# Altium PCB PCB.PcbDoc (part 1 of 2)
Units mil, origin at the board's own origin, x right, y up, seen from the top; angles counter-clockwise.
Board outline 4133.86 x 2519.68 mil, 2 copper layers (Top Layer, Bottom Layer), stack 42.17 mil thick; 80 components, 36 nets, 189 pads, 13 vias.
Unrouted connection lines stored in the file: 60.
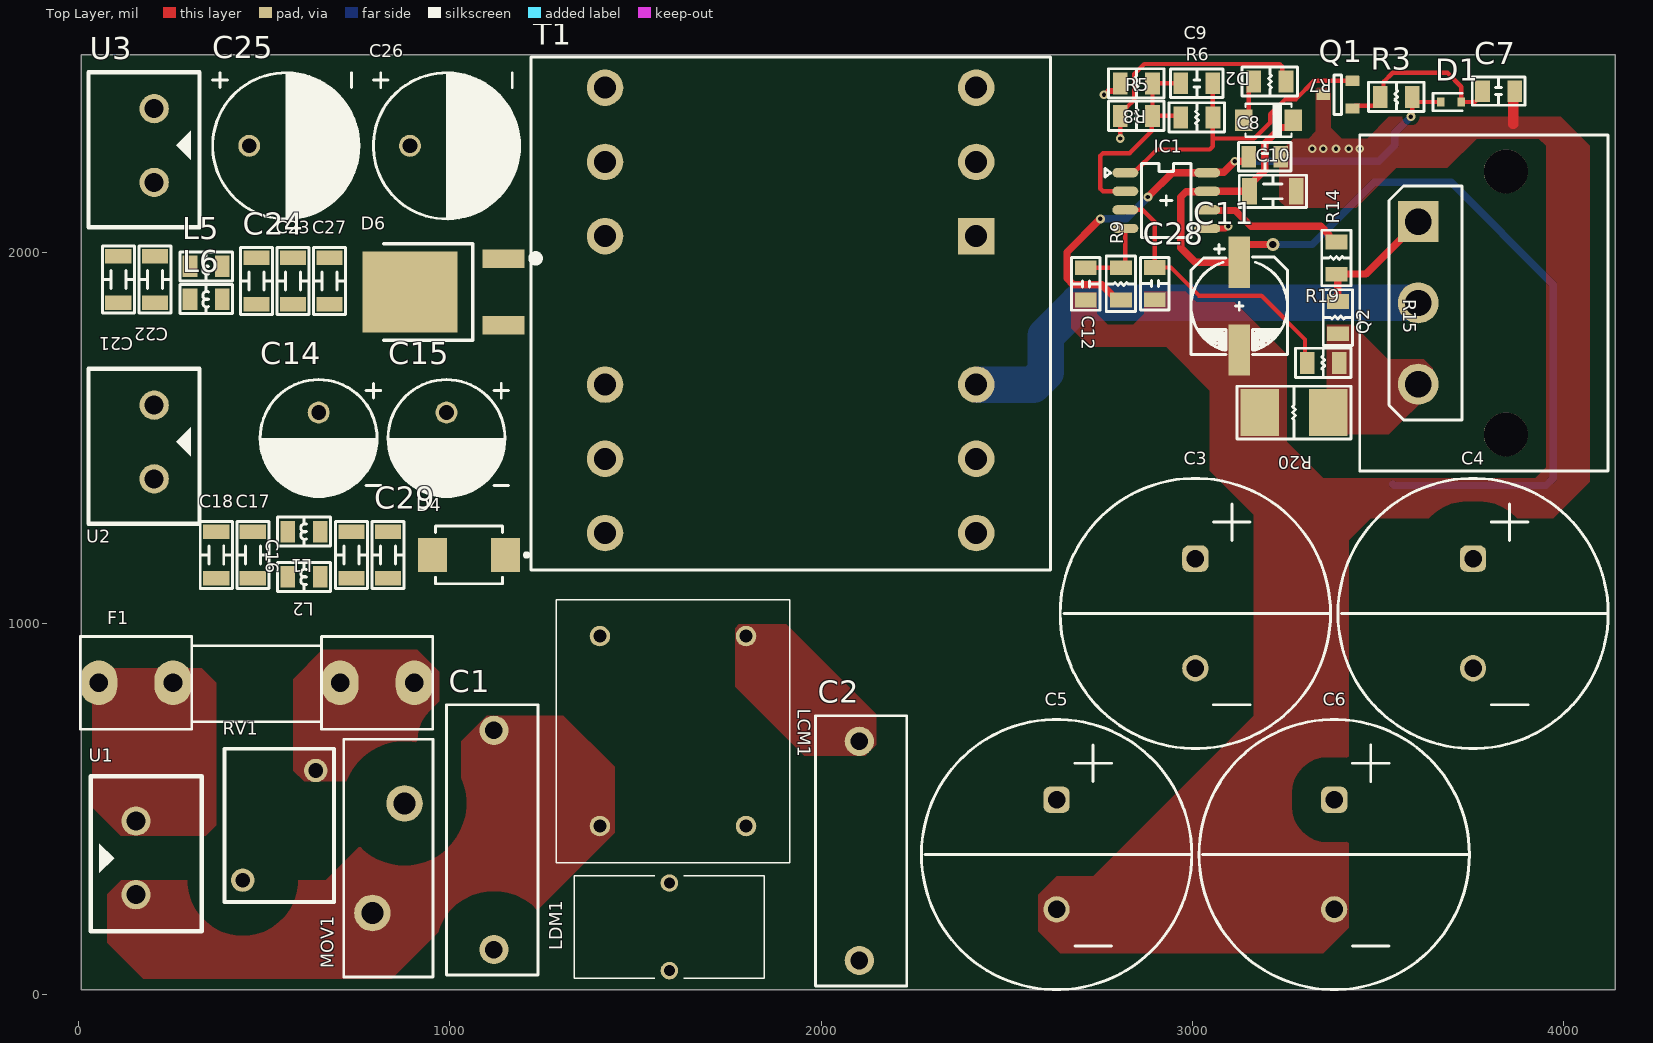
[diagram p0: Top Layer view]
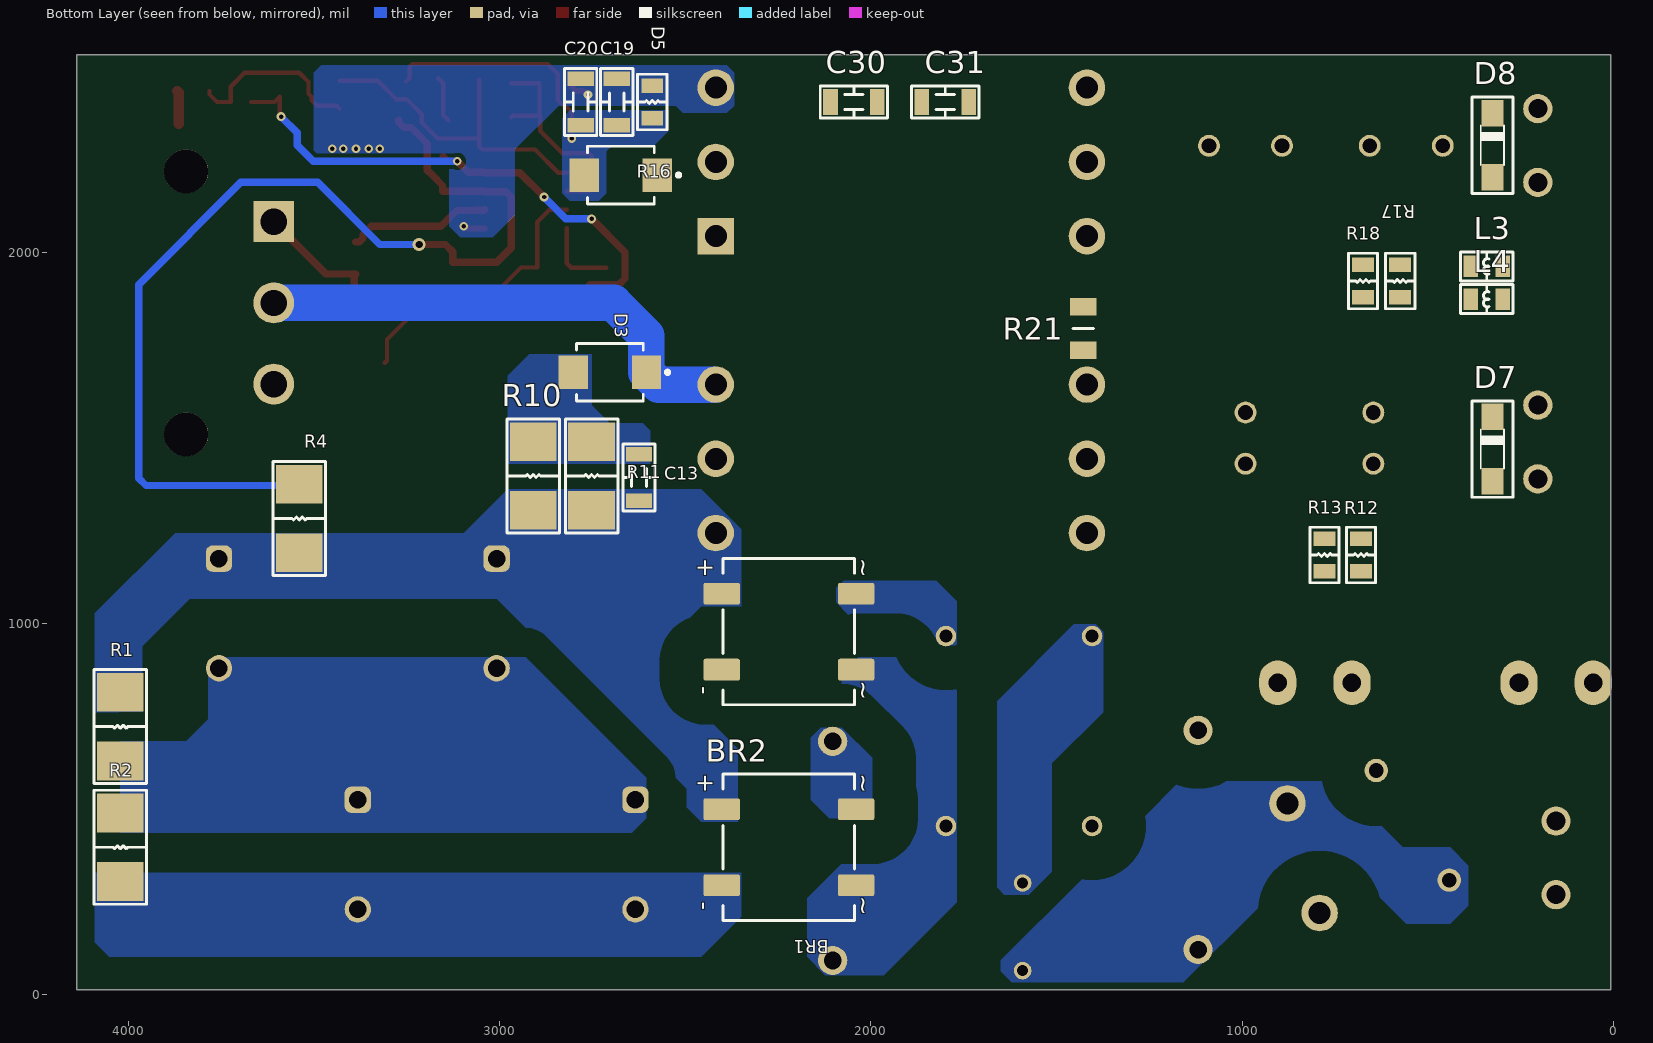
[diagram p1: Bottom Layer view, seen from below]

## Layer stack, top to bottom
Top Solder: solder mask 0.4, Solder Resist, Dk 3.5
Top Layer: signal copper 1.4
Dielectric 1: dielectric 39.3701, FR-4, Dk 4.8
Bottom Layer: signal copper 1.4
Bottom Solder: solder mask 0.4, Solder Resist, Dk 3.5

## Board outline
6.56,13.78 6.56,2533.46 4140.42,2533.46 4140.42,13.78

## Design rules (kind name [scope] priority, off if disabled: settings)
Clearance VOUT_HV_AC [InNetClass('VOUT') vs InNetClass('HV_AC')] p1: gap=157.48 ignorepadtopadclearanceinfootprint=TRUE
Clearance VOUT_HV_DC [InNetClass('HV_DC') vs InNetClass('VOUT')] p2: gap=78.74 ignorepadtopadclearanceinfootprint=TRUE
Clearance HV_AC [InNetClass('HV_AC') vs InNetClass('HV_AC')] p3: gap=118.11 ignorepadtopadclearanceinfootprint=TRUE
Clearance HV_AC_DC [InNetClass('HV_DC') vs InNetClass('HV_AC')] p4: gap=78.74 ignorepadtopadclearanceinfootprint=TRUE
Clearance HV_DC_1 [InNet('VIN') vs InNet('GND')] p5: gap=118.11 ignorepadtopadclearanceinfootprint=TRUE
Clearance HV_DC [InNetClass('HV_DC') vs InNetClass('HV_DC')] p6: gap=78.74 ignorepadtopadclearanceinfootprint=TRUE
Clearance VOUT [InNetClass('VOUT') vs InNetClass('VOUT')] p7: gap=19.68 ignorepadtopadclearanceinfootprint=TRUE
Clearance [All] p8: gap=11.81 ignorepadtopadclearanceinfootprint=TRUE
PlaneConnect [All] p1: planeconnectstyle=Direct reliefexpansion=20 reliefentries=4 reliefconductorwidth=10 reliefairgap=10
PolygonConnect [All] p1: connectstyle=Direct reliefconductorwidth=10 reliefentries=4 polygonreliefangle="90 Angle" airgapwidth=10
RoutingVias [All] p1: holewidth=19.68 width=35.43 viastyle="Through Hole" minholewidth=11.81 minwidth=23.62 maxholewidth=27.56 maxwidth=47.24
SolderMaskExpansion [All] p1: expansion=4 istentingtop=FALSE
Width [All] p1: maxlimit=78.74 minlimit=11.81 preferedwidth=19.68 minimp=50.000000 maximp=50.000000 favimp=50.000000
29 further rules are at their usual default settings.

## Classes and differential pairs
net class HV_DC: GND NetC3_2 VIN
net class HV_AC: AC_L1 AC_L2 AC_L3 AC_N1 AC_N2 NetF1_2

## Components (designator, comment, footprint, x,y, rotation, side; value= is the part's Value field where it differs from the comment)
BR1 "DBLS208GH" "DB SMD" 2221.13,978.35 r90 bottom
BR2 "DBLS208GH" "DB SMD" 2221.13,397.64 r90 bottom
C1 "R474I2470CKA2M" R474I2470CKA2M 1118.76,122.05 r90 top
C2 "R474I2470CKA2M" R474I2470CKA2M 2103.02,683.07 r270 top
C3 "Capcitor" 450BXW68MEFR18X25 3008.53,1175.2 r270 top value="450V 68uF"
C4 "Capcitor" 450BXW68MEFR18X25 3756.56,1175.2 r270 top value="450V 68uF"
C5 "Capcitor" 450BXW68MEFR18X25 2634.51,525.59 r270 top value="450V 68uF"
C6 "Capcitor" 450BXW68MEFR18X25 3382.54,525.59 r270 top value="450V 68uF"
C7 "GRM219R7YA105KA12D" "CAP 0805" 3825.46,2435.04 r0 top value="0805 1uF 35V"
C8 "CL21B104KBCNNNC" "CAP 0805" 3195.54,2257.87 r180 top value="0805 0.1uF 50V"
C9 "GRM2195C1H103JA01D" "CAP 0805" 3012.46,2455.75 r180 top value="0805 10nF"
C10 "C3216X7R1H475M160AC" "Cap 1206" 3217.19,2164.92 r0 top value="1206 4.7uF 50V"
C11 "EEE-FK1H470XL" C-50-47uf_alu 3126.64,1844.49 r0 top value="50V 47uF_6.3pi/smd"
C12 "GCM216R71H102KA37D" "CAP 0805" 2713.25,1915.35 r270 top value="0805 1nF"
C13 "VJ1206A391JXEAT" "Cap 1206" 2624.67,1393.98 r90 bottom value="1206 390pF 500V"
C14 "10ZLH1500MEFC8X20" 10ZLH1500MEFC8X20 646.32,1500 r0 top value="10V 1500uF"
C15 "10ZLH1500MEFC8X20" 10ZLH1500MEFC8X20 990.81,1500 r0 top value="10V 1500uF"
C16 "C3216X7R1H475M160AC" "Cap 1206" 734.91,1185.04 r90 top value="1206 4.7uF 50V"
C17 "C3216X7R1H475M160AC" "CAP 1206" 469.16,1185.04 r270 top value="1206 4.7uF 50V"
C18 "C3216X7R1H475M160AC" "CAP 1206" 370.73,1185.04 r270 top value="1206 4.7uF 50V"
C19 "C3216X7R1H475M160AC" "Cap 1206" 2684.91,2405.51 r90 bottom value="1206 4.7uF 50V"
C20 "C3216X7R1H475M160AC" "Cap 1206" 2782.15,2405.51 r90 bottom value="1206 4.7uF 50V"
C21 "C3216X7R1H475M160AC" "CAP 1206" 106.86,1927.17 r270 top value="1206 4.7uF 50V"
C22 "C3216X7R1H475M160AC" "CAP 1206" 205.29,1927.17 r270 top value="1206 4.7uF 50V"
C23 "C3216X7R1H475M160AC" "Cap 1206" 577.11,1923.23 r270 top value="1206 4.7uF 50V"
C24 "C3216X7R1H475M160AC" "Cap 1206" 478.69,1923.23 r270 top value="1206 4.7uF 50V"
C25 "35ZLJ560M10X20" 35ZLJ560M10X20 557.74,2287.4 r90 top value="35V 560uF"
C26 "35ZLJ560M10X20" 35ZLJ560M10X20 990.81,2287.4 r90 top value="35V 560uF"
C27 "C3216X7R1H475M160AC" "CAP 1206" 675.54,1923.23 r270 top value="1206 4.7uF 50V"
C28 "C0805C101J5RACTU" "CAP 0805" 2898.88,1916.21 r270 top
C29 "C3216X7R1H475M160AC" "Cap 1206" 833.33,1185.04 r270 top value="1206 4.7uF 50V"
C30 "CC1206KKX7RCBB222" "Cap 1206" 2045.95,2405.51 r180 bottom value="1206 2.2nF 1kV"
C31 "CC1206KKX7RCBB222" "Cap 1206" 1799.89,2405.51 r180 bottom value="1206 2.2nF 1kV"
D1 "PMEG3010EB,115" "SOD 523" 3697.5,2405.51 r90 top
D2 "STPST1H100ZFY" SOD-123FL 3205.38,2356.3 r180 top
D3 "S3MB-13-F" "DIODE 1KV 3A" 2703.41,1677.17 r0 bottom value=40pF
D4 "S3MB-13-F" "DIODE 1KV 3A" 1051.26,1185.04 r180 top value=40pF
D5 "S3MB-13-F" "DIODE 1KV 3A" 2673.88,2208.66 r0 bottom value=40pF
D6 "FFSD0665B-F085" "Schottky Diode 650V" 892.39,1893.7 r90 top
D7 "SMAJ5.0A" "SMA (DO-214AC)" 325.46,1470.47 r270 bottom
D8 "SMAJ24CA" "SMA (DO-214AC)" 325.46,2288.98 r270 bottom
F1 "FUSE" FUSE 479,840.55 r0 top
IC1 "UC3843AD8TR" UC3843_SOIC8 2929.79,2139.76 r0 top
L1 "BLM21PG300SN1D" "BEAD 2012" 606.95,1248.03 r180 top value="0805 30R"
L2 "BLM21PG300SN1D" "BEAD 2012" 606.95,1125.98 r180 top value="0805 30R"
L3 "BLM21PG300SN1D" "Bead 2012" 340.93,1962.6 r0 bottom value="0805 30R"
L4 "BLM21PG300SN1D" "Bead 2012" 340.93,1874.02 r0 bottom value="0805 30R"
L5 "BLM21PG300SN1D" "Bead 2012" 343.08,1962.6 r180 top value="0805 30R"
L6 "BLM21PG300SN1D" "Bead 2012" 343.08,1874.02 r180 top value="0805 30R"
LCM1 "SU10VD-10020" SU10VD10020 1404.2,966.54 r270 top
LDM1 "SN5-300" SN5300 1591.2,64.96 r0 top
MOV1 "MOV-14D751K" B72214S2271K101 834.46,368.11 r270 top
Q1 "BJT PNP 40V" "SOT 23 3" 3392.39,2425.2 r90 top
Q2 "SIHG11N80AE-GE3" "N-CH MOSFET 1K2V" 3608.92,1864.17 r270 top
R1 "35221M0JT" "RES 2512" 4022.31,722.44 r90 bottom value="2512 1M"
R2 "35221M0JT" "RES 2512" 4022.31,397.64 r90 bottom value="2512 1M"
R3 "RC0805FR-0733KL" "RES 0805" 3549.87,2415.35 r180 top value="0805 33k"
R4 "35221M0JT" "RES 2512" 3540.02,1283.46 r90 bottom value="2512 1M"
R5 "RC0805FR-0733KL" "RES 0805" 2849.63,2364.17 r180 top value="0805 33k"
R6 "RC0805FR-1310KL" "RES 0805" 3012.62,2368.11 r0 top value="0805 10k"
R7 "RC0805FR-0722RP" "RES 0805" 3209.32,2456.69 r180 top value="0805 22R"
R8 "RC0805FR-1312KL" "RES 0805" 2849.63,2459.68 r0 top value="0805 12k"
R9 "RC0805FR-1312KL" "RES 0805" 2811.68,1915.39 r270 top value="0805 12k"
R10 "CRGP2512F180K" "RES 2512" 2910.1,1397.91 r270 bottom value="2512 180k"
R11 "CRGP2512F180K" "RES 2512" 2752.62,1397.91 r270 bottom value="2512 180k"
R12 "RC0805FR-1310KL" "RES 0805" 675.85,1185.04 r270 bottom value="0805 10k"
R13 "RC0805FR-1310KL" "RES 0805" 774.28,1185.04 r270 bottom value="0805 10k"
R14 "RC0805FR-0722RP" "RES 0805" 3392.39,1985.15 r270 top value="0805 22R"
R15 "RC0805FR-1310KL" "RES 0805" 3388.45,1824.8 r90 top value="0805 10k"
R16 "RC0805FR-1310KL" "RES 0805" 2585.3,2405.51 r270 bottom value="0805 10k"
R17 "RC0805FR-1310KL" "RES 0805" 577.99,1923.23 r90 bottom value="0805 10k"
R18 "RC0805FR-1310KL" "RES 0805" 678.16,1923.23 r90 bottom value="0805 10k"
R19 "RC0805FR-07470RP" "RES 0805" 3353.02,1706.69 r0 top value="0805 470R"
R20 "RES_2512_2.2R" "RES 2512" 3274.28,1568.9 r0 top value="2512 2.2R"
R21 "RES_1206_0R" "RES 1206" 1427.82,1795.28 r270 bottom value="1206 0R"
RV1 "NTC20D-9" NTC20D9 540.21,456.69 r270 top
T1 "PQ 32/20" "Core PQ32/20" 1917.98,1844.09 r90 top
U1 "KF301_2P" KF301_2P 154.2,368.11 r270 top
U2 "KF301_2P" KF301_2P 203.41,1490.16 r90 top
U3 "KF301_2P" KF301_2P 203.41,2288.98 r90 top

## Footprints (in the part's own frame and the unit in brackets; to place one, negate y for a bottom-side part, rotate by r counter-clockwise, add the part's x,y. Pads: shape width x height; smd on the part's side, far side on the other; paste and mask are expansions set on the pad)
10ZLH1500MEFC8X20 [mm]
  round 1.5 hole 1: 1(0,1.75) 2(0,-1.75)
  silkscreen extent -4,-4 4.25,4, body extent -4.25,-4.25 4.25,4.28, height 22.01
35ZLJ560M10X20 [mm]
  round 1.5 hole 1: 1(0,2.5) 2(0,-2.5)
  silkscreen extent -5,-5 5,5, body extent -5.24,-5.25 5.24,5.27, height 22.01
450BXW68MEFR18X25 [mm] "Cap 68uF 450V"
  rrect50% 1.8x1.8 hole 1.2: 1(0,0)
  round 1.8 hole 1.2: 2(7.5,0)
  silkscreen extent -5.5,-9.25 13,9.25, body extent -5.23,-9 12.75,9, height 25
B72214S2271K101 [mm] "430 V 6 kA Varistor 1 Circuit Through Hole Disc 14mm"
  round 2.5 hole 1.5: 1(-3.75,1.1) 2(3.75,-1.1)
  silkscreen extent -8.13,-3.05 8.13,3.05, body extent -7.75,-2.1 7.75,2.1, height 18.5
"BEAD 2012" [mm] "Bead 2012"
  rect 1x1.47 smd: 1(-1.1,0) 2(1.1,0)
  silkscreen extent -1.8,-1 1.8,0.99, body extent -1,-0.69 1,0.76, height 1.28
"Bead 2012" [mm] "Bead 2012"
  rect 1x1.47 smd: 1(-1.1,0) 2(1.1,0)
  silkscreen extent -1.8,-1 1.8,0.99, body extent -1,-0.69 1,0.76, height 1.28
C-50-47uf_alu [mm]
  rect 1.5x3.5 smd: 1(0,3.284) 2(0,-2.716)
  silkscreen extent -3.3,-3.02 3.31,4.48, body extent -3.4,-3.69 3.4,4.26, height 7.7
"CAP 0805" [mm] "0805 (2012)"
  rect 1x1.47 smd: 1(-1.1,0) 2(1.1,0)
  silkscreen extent -1.8,-0.98 1.8,0.98, body extent -1,-0.69 1,0.76, height 1.28
"Cap 1206" [mm]
  rect 1x1.8 smd: 1(-1.6,0) 2(1.6,0)
  silkscreen extent -2.3,-1.1 2.3,1.1, body extent -1.7,-0.85 1.7,0.9, height 1.8
"CAP 1206" [mm]
  rect 1x1.8 smd: 1(-1.6,0) 2(1.6,0)
  silkscreen extent -2.3,-1.1 2.3,1.1, body extent -1.7,-0.85 1.7,0.9, height 1.8
"Core PQ32/20" [mm]
  round 2.5 hole 1.5: 1(15.24,-12.7) 2(10.16,-12.7) 4(-5.08,-12.7) 5(-10.16,-12.7) 6(-15.24,-12.7) 7(15.24,12.7) 8(10.16,12.7) 9(5.08,12.7) 10(-5.08,12.7) 11(-10.16,12.7) 12(-15.24,12.7)
  rect 2.5x2.5 hole 1.5: 3(5.08,-12.7)
  silkscreen extent -17.78,-17.78 17.34,17.78, body extent -16,-17 16,17, height 20
"DB SMD" [mm]
  rrect20% 1.5x2.5 smd: +(2.6,4.6) -(-2.6,4.6) ~1(-2.6,-4.6) ~2(2.6,-4.6)
  silkscreen extent -5,-4.5 5,4.5, body extent -4.16,-5.02 4.16,5.02, height 2.93
"DIODE 1KV 3A" [mm]
  rect 2x2.3 smd paste+0: A(-2.5,0) K(2.5,0)
  silkscreen extent -4.07,-1.97 2.28,1.97, body extent -2.66,-1.81 2.64,1.81, height 2.5
FUSE [mil] "De Fuse"
  oval 100x120 hole 50: 1(-425,0) 1(-225,0) 2(225,0) 2(425,0)
  silkscreen extent -475,-125 475,125, body extent -448,-117 459,127, height 378
KF301_2P [mm] "Header Power 2 pins Type: KF301, 2 pins, 200mil (5.08mm) pitch"
  round 2 hole 1.3 mask+0.1: 1(-2.54,0) 2(2.5,0)
  silkscreen extent -5.6,-3.1 5,4.5, body extent -5.6,-3 5,4.6, height 10
"N-CH MOSFET 1K2V" [mm]
  round 3 hole 3 unplated: 4(-9,6) 4(9,6)
  round 2.8 hole 1.8: D(0,0) S(5.56,0)
  rect 2.8x2.8 hole 1.8: G(-5.56,0)
  silkscreen extent -11.5,-4 11.5,13, body extent -11.5,-4 11.5,13, height 25
NTC20D9 [mm]
  round 1.6 hole 1 paste-2539.97 mask+0.1: 1(-3.75,2.5) 2(3.75,-2.5)
  silkscreen extent -5.25,-3.75 5.25,3.75
R474I2470CKA2M [mm]
  round 2 hole 1.2: 1(0,0) 2(15,0)
  silkscreen extent -1.75,-3 16.75,3.25, body extent -1.65,-3 16.65,3.21, height 17.6
"RES 0805" [mm] "Resistor 2.0 x 1.2 mm (LxW typ)"
  rect 1x1.5 smd: 1(-1.1,-0.1) 2(1.1,-0.1)
  silkscreen extent -1.9,-1.1 1.9,0.9, body extent -1,-0.7 1,0.55, height 0.6
"RES 1206" [mm]
  rect 1.2x1.8 smd: 1(-1.5,0) 2(1.5,0)
  silkscreen extent 0,-0.7 0,0.7, body extent -1.6,-0.8 1.6,0.8, height 0.75
"RES 2512" [mm]
  rect 2.65x3.2 smd: 1(-2.35,0) 2(2.35,0)
  silkscreen extent -3.9,-1.8 3.9,1.8, body extent -3.17,-1.5 3.17,1.5, height 0.8
"Schottky Diode 650V" [mm]
  rect 1.25x2.85 smd: 1(2.28,-6.4) 2(-2.28,-6.4)
  rect 5.55x6.5 smd: 2(0,0)
  silkscreen extent -3.3,-8.84 3.3,1.8, body extent -3.36,-7.39 3.36,3.02, height 2.39
"SMA (DO-214AC)" [mm]
  rect 1.8x1.5 smd: A(2.2,0) K(-2.2,0)
  silkscreen extent -3.3,-1.4 3.3,1.4, body extent -2.6,-1.36 2.6,1.36, height 2.7
SN5300 [mm]
  round 1.2 hole 0.75: 1(0,0) 2(0,6)
  silkscreen extent -6.5,-0.5 6.5,6.5, body extent -6.5,-0.5 6.5,6.5, height 11.5
"SOD 523" [mm]
  rect 0.6x0.5 smd: A(0,-0.7) K(0,0.7)
  silkscreen extent -0.6,-0.75 0.6,1.25, body extent -0.4,-0.8 0.4,0.8, height 0.65
SOD-123FL [mm]
  rect 1.2x1.5 smd: A(1.7,0) K(-1.7,0)
  silkscreen extent -1.57,-1.2 1.57,1.2, body extent -1.96,-1 1.96,1, height 1.1
"SOT 23 3" [mm]
  rrect10% 0.7x0.95 smd: B(-0.95,-1) C(0,1) E(0.95,-1)
  silkscreen extent -1.35,-0.25 1.35,0.25, body extent -1.45,-1.2 1.45,1.2, height 1.11
SU10VD10020 [mm]
  round 1.4 hole 0.9: 1(0,0) 2(13,0) 3(0,10) 4(13,10)
  silkscreen extent -2.5,-3 15.5,13, body extent -2.5,-3 15.5,13, height 19.94
UC3843_SOIC8 [mil] "SOIC8"
  oval 70x25 smd: 1(-109.96,75.16) 2(-109.96,25.16) 3(-109.96,-24.84) 4(-109.96,-74.84) 5(110.51,-74.84) 6(110.51,-24.84) 7(110.51,25.16) 8(110.51,75.16)
  silkscreen extent -165,-100 67,100, body extent -117,-96 119,96, height 69

## Part data
BR1 BR2: library part "BRIDGE RECT 1.2KV 2A", "Bridge Rectifier Single Phase Standard 1.2 kV Surface Mount DBLS", Manufacturer=FairchildSemiconductor, Operating Temperature=-55to150°C, Package=4SDIPSMD, Package Description="4-Pin Surface Mount Device, Body 8.28 x 6.35 mm, Pitch 5.1 mm", Package Reference="SDIP 4L", Peak Average Forward Current=1.5@Ta=40CA, Peak Forward Voltage=1.1@1AV, Peak Reverse Current=5uA, Peak Reverse Repetitive Voltage=1000V, Supplier Part Number 1=1801-DBLS158GCT-ND, Bridge Type=SinglePhase, Category=BridgeRectifier, Configuration=Single, Datasheet URL=http://www.farnell.com/datasheets/1941063.pdf, Datasheet Version="Rev. 1.5, 05/2015", Manufacturer URL=https://www.fairchildsemi.com/, Mounting=SurfaceMount, Mounting Technology=SurfaceMount, Packaging=Tape&Reel, Supplier 1=Digikey
C1 C2: "0.047 µF Film Capacitor 440V 1000V (1kV) Polypropylene (PP), Metallized Radial", Capacitance=47nF, Case/Package=Radial, Dielectric Material=PP, Manufacturer 1=KEMET, Max Operating Temperature=110°C, Min Operating Temperature=-40°C, Ratings=AEC-Q200,X1, Supplier Part Number 1=399-17231-1-ND, Tolerance=20%, Voltage Rating (AC)=440V, Voltage Rating (DC)=1kV, Category 1="Film Capacitors", ComponentLink1Description=https://datasheet.ciiva.com/46436/1848873-46436253.pdf?src-supplier=Element14, ComponentLink1URL=https://datasheet.ciiva.com/46436/1848873-46436253.pdf?src-supplier=Element14, Description 1="Cap Film 0.047UF 20% 1KVDC Rad", Manufacturer Part Number 1=R474I2470CKA2M, Mount="Through Hole", Packaging="Cut Tape", Parameter 1="0.047uF 440Vac", Pricing 1="1=0,69, 10=0,482, 50=0,4056, 100=0,3302, 500=0,27518 (USD)", RoHS 1=Yes, RoHS Compliant=Yes, Series=R47, Stock 1=4929, Supplier 1=Digikey, Termination="PC Pins"
C3 C4 C5 C6: library part 450BXW68MEFR18X25, "Capcitor-ALU-450V 68uF"
C7: library part "Cap 0805 1uF", "1 µF ±10% 35V Ceramic Capacitor X7R 0805 (2012 Metric)", Supplier Part Number 1=490-10494-1-ND, Supplier 1=Digi-Key
C8: library part "Cap 0805 0.1uF", "0.1 µF ±10% 50V Ceramic Capacitor X7R 0805 (2012 Metric)", Manufacturer 1=Samsung, Supplier Part Number 1=1276-1003-1-ND, Category 1="Ceramic Capacitors", ComponentLink1Description=https://datasheet.ciiva.com/25710/cl21b104kbcnnnc-25710182.pdf?src-supplier=Digi-Key, ComponentLink1URL=https://datasheet.ciiva.com/25710/cl21b104kbcnnnc-25710182.pdf?src-supplier=Digi-Key, ComponentLink2Description=https://datasheet.ciiva.com/29199/454152-da-01-en-vs-kondensator-0805-29199814.pdf?src-supplier=Conrad, ComponentLink2URL=https://datasheet.ciiva.com/29199/454152-da-01-en-vs-kondensator-0805-29199814.pdf?src-supplier=Conrad, Description 1="Multilayer Ceramic Capacitor, 0.1 uF, 50 V, ± 10%, X7R, 0805 [2012 Metric]", Manufacturer Part Number 1=CL21B104KBCNNNC, Pricing 1="1=0,1, 10=0,044, 50=0,024, 100=0,0196, 500=0,01404, 1000=0,01103 (USD)", RoHS 1=Yes, Stock 1=559254, Supplier 1=Digi-Key
C9: library part "Cap 0805 10nF", "10000 pF ±5% 50V Ceramic Capacitor C0G, NP0 0805 (2012 Metric)", Manufacturer 1=Murata, Manufacturer Part Number 1=GRM21BR61H106KE43L, Supplier Part Number 1=490-1642-1-ND, Category 1="Ceramic Capacitors", ComponentLink1Description=https://datasheet.octopart.com/GRM21BR61H106KE43L-Murata-datasheet-155345082.pdf?src-supplier=Element14, ComponentLink1URL=https://datasheet.octopart.com/GRM21BR61H106KE43L-Murata-datasheet-155345082.pdf?src-supplier=Element14, ComponentLink2Description=https://search.murata.co.jp/Ceramy/image/img/A01X/G101/ENG/GRM21BR61H106KE43-01A.pdf?src-supplier=Digi-Key, ComponentLink2URL=https://search.murata.co.jp/Ceramy/image/img/A01X/G101/ENG/GRM21BR61H106KE43-01A.pdf?src-supplier=Digi-Key, ComponentLink3Description=https://datasheet.octopart.com/GRM21BR61H106KE43L-Murata-datasheet-165579666.pdf?src-supplier=TME, ComponentLink3URL=https://datasheet.octopart.com/GRM21BR61H106KE43L-Murata-datasheet-165579666.pdf?src-supplier=TME, Description 1="Capacitor Ceramic Multilayer", Pricing 1="1=0,3, 10=0,209, 50=0,139, 100=0,1182, 500=0,08342, 1000=0,073 (USD)", RoHS 1=Yes, Stock 1=19692, Supplier 1=Digikey
C10 C16 C17 C18 C19 C20 C21 C22 C23 C24 C27 C29: library part "Cap 1206 4.7uF", "4.7 µF ±20% 50V Ceramic Capacitor X7R 1206 (3216 Metric)", Capacitance=10uF, Case Code (Imperial)=1206, Case Code (Metric)=3216, Dielectric=X7R, Manufacturer 1=TDK, Manufacturer Part Number 1=CGA5L1X7R1V106M160AC, Max Operating Temperature=125°C, Min Operating Temperature=-55°C, Package Quantity=2000, Ratings=AEC-Q200, Supplier Part Number 1=445-8033-1-ND, Tolerance=20%, Voltage Rating=35V, Case/Package=1206, Category 1="Ceramic Capacitors", ComponentLink1Description=https://product.tdk.com/info/en/catalog/datasheets/mlcc_automotive_general_en.pdf?src-supplier=Digi-Key, ComponentLink1URL=https://product.tdk.com/info/en/catalog/datasheets/mlcc_automotive_general_en.pdf?src-supplier=Digi-Key, ComponentLink2Description=http://product.tdk.com/capacitor/mlcc/detailed_information.php?lang=en&ref=jp&part_no=CGA5L1X7R1V106M160AC&src-supplier=Mouser, ComponentLink2URL=http://product.tdk.com/capacitor/mlcc/detailed_information.php?lang=en&ref=jp&part_no=CGA5L1X7R1V106M160AC&src-supplier=Mouser, ComponentLink3Description=http://product.tdk.com/capacitor/mlcc/class/print_detail_pdf.php?lang=en&part_no=CGA5L1X7R1V106M160AC&src-supplier=Avnet, ComponentLink3URL=http://product.tdk.com/capacitor/mlcc/class/print_detail_pdf.php?lang=en&part_no=CGA5L1X7R1V106M160AC&src-supplier=Avnet, ComponentLink4Description=https://product.tdk.com/info/en/catalog/spec/mlccspec_automotive_general_midvoltage_en.pdf?src-supplier=Digi-Key, ComponentLink4URL=https://product.tdk.com/info/en/catalog/spec/mlccspec_automotive_general_midvoltage_en.pdf?src-supplier=Digi-Key, Description 1="Cap Ceramic 10uF 35V X7R 20% SMD 1206 125°C Blister Plastic T/R", Height=1.6mm, Length=0.126inch, Mount="Surface Mount", Packaging="Tape and Reel", Pricing 1="1=0,72, 10=0,53, 50=0,4242, 100=0,3636, 500=0,28784, 1000=0,2424 (USD)", RoHS 1=Yes, RoHS Compliant=Yes, Series=CGA, Stock 1=4126, Supplier 1=Digikey, Termination=SMD/SMT, Thickness=0.071inch, Voltage Rating (DC)=35V, Weight=0.000571oz, Width=1.6mm
C11: library part "Capacitor-50V 47u_6.3pi", "CAP ALUM 47UF 20% 50V SMD", Manufacturer=Panasonic, Package/Case="6.3mm (dia)", Supplier Part Number=10-EEE-FK1H470XLCTND, Supplier Part Number 1=10-EEE-FK1H470XLCT-ND, Supplier 1=Digi-Key
C12: library part "Cap 0805 1nF", "1000 pF 50 VDC 10% 0805 X7R", Manufacturer 1=Murata, Manufacturer Part Number 1=GRM21BR61H106KE43L, Supplier Part Number 1=490-6057-1-ND, Category 1="Ceramic Capacitors", ComponentLink1Description=https://datasheet.octopart.com/GRM21BR61H106KE43L-Murata-datasheet-155345082.pdf?src-supplier=Element14, ComponentLink1URL=https://datasheet.octopart.com/GRM21BR61H106KE43L-Murata-datasheet-155345082.pdf?src-supplier=Element14, ComponentLink2Description=https://search.murata.co.jp/Ceramy/image/img/A01X/G101/ENG/GRM21BR61H106KE43-01A.pdf?src-supplier=Digi-Key, ComponentLink2URL=https://search.murata.co.jp/Ceramy/image/img/A01X/G101/ENG/GRM21BR61H106KE43-01A.pdf?src-supplier=Digi-Key, ComponentLink3Description=https://datasheet.octopart.com/GRM21BR61H106KE43L-Murata-datasheet-165579666.pdf?src-supplier=TME, ComponentLink3URL=https://datasheet.octopart.com/GRM21BR61H106KE43L-Murata-datasheet-165579666.pdf?src-supplier=TME, Description 1="Capacitor Ceramic Multilayer", Pricing 1="1=0,3, 10=0,209, 50=0,139, 100=0,1182, 500=0,08342, 1000=0,073 (USD)", RoHS 1=Yes, Stock 1=19692, Supplier 1=Digikey
C13: library part "Cap 1206 390pF", "CAP CER 390PF 500V C0G/NP0 1206", Capacitance=390pF, Case Code (Imperial)=1206, Case Code (Metric)=3216, Dielectric=X7R, Manufacturer 1=TDK, Manufacturer Part Number 1=CGA5L1X7R1V106M160AC, Max Operating Temperature=125°C, Min Operating Temperature=-55°C, Package Quantity=2000, Ratings=AEC-Q200, Supplier Part Number 1=720-VJ1206A391JXEATCT-ND, Tolerance=20%, Voltage Rating=35V, Case/Package=1206, Category 1="Ceramic Capacitors", ComponentLink1Description=https://product.tdk.com/info/en/catalog/datasheets/mlcc_automotive_general_en.pdf?src-supplier=Digi-Key, ComponentLink1URL=https://product.tdk.com/info/en/catalog/datasheets/mlcc_automotive_general_en.pdf?src-supplier=Digi-Key, ComponentLink2Description=http://product.tdk.com/capacitor/mlcc/detailed_information.php?lang=en&ref=jp&part_no=CGA5L1X7R1V106M160AC&src-supplier=Mouser, ComponentLink2URL=http://product.tdk.com/capacitor/mlcc/detailed_information.php?lang=en&ref=jp&part_no=CGA5L1X7R1V106M160AC&src-supplier=Mouser, ComponentLink3Description=http://product.tdk.com/capacitor/mlcc/class/print_detail_pdf.php?lang=en&part_no=CGA5L1X7R1V106M160AC&src-supplier=Avnet, ComponentLink3URL=http://product.tdk.com/capacitor/mlcc/class/print_detail_pdf.php?lang=en&part_no=CGA5L1X7R1V106M160AC&src-supplier=Avnet, ComponentLink4Description=https://product.tdk.com/info/en/catalog/spec/mlccspec_automotive_general_midvoltage_en.pdf?src-supplier=Digi-Key, ComponentLink4URL=https://product.tdk.com/info/en/catalog/spec/mlccspec_automotive_general_midvoltage_en.pdf?src-supplier=Digi-Key, Description 1="Cap Ceramic 10uF 35V X7R 20% SMD 1206 125°C Blister Plastic T/R", Height=1.6mm, Length=0.126inch, Mount="Surface Mount", Packaging="Tape and Reel", Pricing 1="1=0,72, 10=0,53, 50=0,4242, 100=0,3636, 500=0,28784, 1000=0,2424 (USD)", RoHS 1=Yes, RoHS Compliant=Yes, Series=CGA, Stock 1=4126, Supplier 1=Digikey, Termination=SMD/SMT, Thickness=0.071inch, Voltage Rating (DC)=35V, Weight=0.000571oz, Width=1.6mm
C14 C15: "1500 µF 10 V Aluminum Electrolytic Capacitors Radial, Can 8000 Hrs @ 105°C", Manufacturer 1=Rubycon, Supplier Part Number 1=1189-1717-ND, Voltage Rating (DC)=10V, Category 1="Aluminum Electrolytic Capacitors", ComponentLink1Description=https://datasheet.ciiva.com/6311/e-zlh-6311629.pdf?src-supplier=Digikey, ComponentLink1URL=https://datasheet.ciiva.com/6311/e-zlh-6311629.pdf?src-supplier=Digikey, ComponentLink2Description=https://datasheet.ciiva.com/22732/1910927-22732380.pdf?src-supplier=Element14, ComponentLink2URL=https://datasheet.ciiva.com/22732/1910927-22732380.pdf?src-supplier=Element14, Description 1="Radial Can ALUMINUM ELECTROLYTIC CAPACITOR ZLH 10V 1500muF ±20% 0.315Dia 8.00mm", Manufacturer Part Number 1=10ZLH1500MEFC8X20, Pricing 1="1=0,6, 10=0,372, 50=0,277, 100=0,2469, 500=0,19462, 1000=0,17808, 2500=0,16039, 5000=0,14959 (USD)", RoHS 1=Yes, Stock 1=6103, Supplier 1=Digikey
C25 C26: "560 µF 35 V Aluminum Electrolytic Capacitors Radial, Can 10000 Hrs @ 105°C"
C28: library part "CAP 0805 100pF", "CAP, CERM, 100 pF, 50 V, +/- 5%, X7R, 0805", Manufacturer 1=KEMET, Supplier Part Number 1=80-C0805C101J5R, Category 1="Ceramic Capacitors", ComponentLink1Description=http://components.arrow.com/part/dataview/42933017S9108484N7429?src-supplier=Arrow+Electronics, ComponentLink1URL=http://components.arrow.com/part/dataview/42933017S9108484N7429?src-supplier=Arrow+Electronics, ComponentLink2Description=https://datasheet.octopart.com/C0805C101J5RACTU-KEMET-datasheet-157246124.pdf?src-supplier=TME, ComponentLink2URL=https://datasheet.octopart.com/C0805C101J5RACTU-KEMET-datasheet-157246124.pdf?src-supplier=TME, Description 1="Cap Ceramic 100pF 50V X7R 5% SMD 0805 125C Paper T/R", Manufacturer Part Number 1=C0805C101J5RACTU, Parameter 1="0805 100pF 50V", Pricing 1="1=0,14, 10=0,059, 50=0,059, 100=0,034, 1000=0,027, 10000=0,022 (USD)", RoHS 1=Yes, Stock 1=27580, Supplier 1=Mouser
C30 C31: library part "Cap 1206 2.2nF", "2200 pF ±10% 1000V (1kV) Ceramic Capacitor X7R 1206 (3216 Metric)", Manufacturer 1=Yageo, Supplier Part Number 1=311-1511-1-ND, Voltage Rating (AC)=1kV, Category 1="Ceramic Capacitors", ComponentLink1Description=https://datasheet.ciiva.com/11787/0900766b80d8503a-11787843.pdf?src-supplier=Rs, ComponentLink1URL=https://datasheet.ciiva.com/11787/0900766b80d8503a-11787843.pdf?src-supplier=Rs, ComponentLink2Description=https://datasheet.ciiva.com/13264/upy-gp-np0-16v-to-50v-8-3714-13264204.pdf?src-supplier=Mouser, ComponentLink2URL=https://datasheet.ciiva.com/13264/upy-gp-np0-16v-to-50v-8-3714-13264204.pdf?src-supplier=Mouser, ComponentLink3Description=https://datasheet.ciiva.com/190/mlccorderingcode-190678.pdf?src-supplier=Digikey, ComponentLink3URL=https://datasheet.ciiva.com/190/mlccorderingcode-190678.pdf?src-supplier=Digikey, ComponentLink4Description=https://datasheet.ciiva.com/190/mlccorderingcode-190679.pdf?src-supplier=Digikey, ComponentLink4URL=https://datasheet.ciiva.com/190/mlccorderingcode-190679.pdf?src-supplier=Digikey, ComponentLink5Description=https://datasheet.ciiva.com/190/mlccorderingcode-190680.pdf?src-supplier=Digikey, ComponentLink5URL=https://datasheet.ciiva.com/190/mlccorderingcode-190680.pdf?src-supplier=Digikey, Description 1="Multilayer Ceramic Capacitor, 2200 pF, 1000 V, ± 10%, X7R, 1206 [3216 Metric]", Manufacturer Part Number 1=CC1206KKX7RCBB222, Material=4241ConductorMaterial, Pricing 1="1=0,18, 10=0,119, 50=0,0754, 100=0,0603, 500=0,04358, 1000=0,03856 (USD)", RoHS 1=Yes, Stock 1=424375, Supplier 1=Digikey
D1: library part "Diode 30V 1A", "Diode 30 V 1A Surface Mount SOD-523", Average Rectified Current=1A, Forward Voltage=680mV, Manufacturer 1=Nexperia, Max Forward Surge Current (Ifsm)=5A, Max Operating Temperature=150°C, Max Repetitive Reverse Voltage (Vrrm)=30V, Max Reverse Current=500uA, Max Surge Current=3A, Min Operating Temperature=-65°C, Supplier Part Number 1=1727-5834-1-ND, Category 1="Rectifier Diodes", ComponentLink1Description=https://datasheet.octopart.com/BZX585-C9V1%2C135-Nexperia-datasheet-81456219.pdf?src-supplier=Future+Electronics, ComponentLink1URL=https://datasheet.octopart.com/BZX585-C9V1%2C135-Nexperia-datasheet-81456219.pdf?src-supplier=Future+Electronics, ComponentLink2Description=https://assets.nexperia.com/documents/packing/SOD523_115.pdf?src-supplier=Digikey, ComponentLink2URL=https://assets.nexperia.com/documents/packing/SOD523_115.pdf?src-supplier=Digikey, ComponentLink3Description=https://datasheet.octopart.com/PMEG3010EB%2C115-Nexperia-datasheet-12552804.pdf?src-supplier=Farnell, ComponentLink3URL=https://datasheet.octopart.com/PMEG3010EB%2C115-Nexperia-datasheet-12552804.pdf?src-supplier=Farnell, Description 1="Rectifier Diode, Schottky, 1 Phase, 1 Element, 1A, Silicon", Element Configuration=5460ElementConfiguration, Forward Current=1A, Lead Free=5697LeadFree, Manufacturer Part Number 1=PMEG3010EB,115, Max Reverse Leakage Current=500uA, Max Reverse Voltage (DC)=30V, Mount=8Mount, Number of Pins=2NUMBER, Peak Non-Repetitive Surge Current=5A, Pricing 1="1=0,46, 10=0,326, 100=0,1644, 500=0,14572, 1000=0,11341, 3000=0,1015, 6000=0,09923, 9000=0,08789, 30000=0,08676, 75000=0,07371 (USD)", Radiation Hardening=5898YesNo, Reach SVHC Compliant=4186SVHC, RoHS 1=Yes, RoHS Compliant=Yes, Stock 1=7761, Supplier 1=Digikey
D2: "Diode 100 V 1A Surface Mount SOD-123F", Manufacturer 1=STMicroelectronics, Supplier Part Number 1=497-STPST1H100ZFYCT-ND, Category 1=Uncategorized, ComponentLink1Description=https://datasheet.ciiva.com/6574/littelfuse-tvs-diode-smf-datasheet-pdf-6574037.pdf?src-supplier=Digi-Key, ComponentLink1URL=https://datasheet.ciiva.com/6574/littelfuse-tvs-diode-smf-datasheet-pdf-6574037.pdf?src-supplier=Digi-Key, Description 1="Automotive 100 V, 1 A Power Scho", Manufacturer Part Number 1=STPST1H100ZFY, Pricing 1="1=0,36, 10=0,276, 100=0,1655, 500=0,15326, 1000=0,10422 (USD)", RoHS 1=No, Stock 1=4053, Supplier 1=Digikey
D3 D4 D5: library part "DIODE 1000V 3A", "DIODE GEN PURP 1KV 3A SMB", Capacitance=40pF, Forward Current=3A, Manufacturer="Diodes Inc.", Max Junction Temp=+150°C, Max Repetitive Reverse Voltage=1000V, Max Surge Forward Current=100A, Package=SMB, Peak Reverse Current=10uA, Supplier Part Number 1=S3MB-FDICT-ND, Temperature="-65°C to +150°C", Temperature Range Low=-65°C, Automotive=No, Category=Diode, ComponentLink2Description=Datasheet, ComponentLink2URL=https://www.diodes.com/assets/Datasheets/ds16005.pdf, Device Class L1="Discrete Semiconductors", Device Class L2=Diodes, Device Class L3="Rectifier Diodes", Digikey Description="DIODE GEN PURP 1KV 3A SMB", Footprint Url=https://www.diodes.com/assets/Package-Files/SMB.pdf, Height=2.5mm, Lead Free=Yes, Manufacturer Part Number=S3MB-13-F, Mouser Description="Rectifiers 1000V 3A", Octopart=https://octopart.com/s3mb-13-f-diodes+inc.-333387, Reverse Voltage=1000V, RoHS=TRUE, Standoff Height=0.05mm, Supplier 1=Digikey, Temperature Range High=+150°C
D6: library part "Schotty Diode 650V 6A", "Schottky Diodes & Rectifiers 650V 6A SIC SBD", Arrow Part Number=FFSD08120A, Manufacturer_Name=onsemi, Mouser Part Number=863-FFSD08120A, Supplier Part Number 1=5556-FFSD0665B-F085CT-ND, Arrow Price/Stock=https://www.arrow.com/en/products/ffsd08120a/on-semiconductor, Datasheet Link=http://www.onsemi.com/pub/Collateral/FFSD08120A-D.PDF, Manufacturer_Part_Number=FFSD08120A, Mouser Price/Stock=https://www.mouser.co.uk/ProductDetail/onsemi/FFSD08120A?qs=f9yNj16SXrKqhVkeFnS%2F%252BA%3D%3D, Supplier 1=Digikey
D7: "9.2V Clamp 43.5A Ipp Tvs Diode Surface Mount DO-214AC (SMA)", Breakdown Voltage=6.4V, Case/Package=DO-214AC, Clamping Voltage=9.2V, Leakage Current=800uA, Manufacturer 1=Littelfuse, Max Breakdown Voltage=7V, Max Operating Temperature=150°C, Max Power Dissipation=3.3W, Max Surge Current=43.5A, Min Operating Temperature=-65°C, Operating Supply Voltage=5V, Package Quantity=5000, Peak Pulse Power=400W, Power Line Protection=No, Supplier Part Number 1=SMAJ5.0ALFCT-ND, Test Current=10mA, Category 1="TVS Diodes", Clamping Voltage-Max=9.2V, ComponentLink1Description=https://datasheet.ciiva.com/25624/0900766b810f4edb-25624839.pdf?src-supplier=Rs, ComponentLink1URL=https://datasheet.ciiva.com/25624/0900766b810f4edb-25624839.pdf?src-supplier=Rs, ComponentLink2Description=https://datasheet.ciiva.com/8062/littelfuse-tvs-diode-smaj-8062271.pdf?src-supplier=Element14, ComponentLink2URL=https://datasheet.ciiva.com/8062/littelfuse-tvs-diode-smaj-8062271.pdf?src-supplier=Element14, ComponentLink3Description=https://datasheet.ciiva.com/28473/607617-28473433.pdf?src-supplier=Element14, ComponentLink3URL=https://datasheet.ciiva.com/28473/607617-28473433.pdf?src-supplier=Element14, ComponentLink4Description=https://datasheet.ciiva.com/4507/littelfuse-tvs-diode-smaj-23503-4507964.pdf?src-supplier=Mouser, ComponentLink4URL=https://datasheet.ciiva.com/4507/littelfuse-tvs-diode-smaj-23503-4507964.pdf?src-supplier=Mouser, ComponentLink5Description=https://datasheet.ciiva.com/16380/littelfuse-tvs-diode-smaj-16380982.pdf?src-supplier=Future+Electronics, ComponentLink5URL=https://datasheet.ciiva.com/16380/littelfuse-tvs-diode-smaj-16380982.pdf?src-supplier=Future+Electronics, Description 1="SMAJ Series 9.2 V 400 W Surface Mount Uni-Directional TVS Diode - DO-214AC", Diode Type=ZENER, Direction=Unidirectional, Height=2.087mm, Length=4.5mm, Manufacturer Part Number 1=SMAJ5.0A, Max Reverse Leakage Current=800uA, Min Breakdown Voltage=6.4V, Mount="Surface Mount", Number of Channels=1, Number of Elements=1, Number of Pins=2, Number of Unidirectional Channels=1, Packaging="Tape and Reel", Peak Pulse Current=43.5A, Polarity=Unidirectional, Power Dissipation=400W, Pricing 1="1=0,39, 10=0,277, 100=0,1399, 500=0,124, 1000=0,09649, 2000=0,08636, 5000=0,08443, 10000=0,07478, 25000=0,07382, 50000=0,06272, 125000=0,06031 (USD)", Reach SVHC Compliant=No, Reverse Breakdown Voltage=6.4V, Reverse Standoff Voltage=5V, RoHS 1=Yes, RoHS Compliant=Yes, Series=SMAJ, Stock 1=104022, Supplier 1=Digikey, Termination=SMD/SMT, Width=2.79mm
D8: "38.9V Clamp 10.3A Ipp Tvs Diode Surface Mount DO-214AC (SMA)", Case/Package=DO-214AC, Clamping Voltage=38.9V, Leakage Current=1uA, Manufacturer 1=Littelfuse, Max Breakdown Voltage=29.5V, Max Operating Temperature=150°C, Max Power Dissipation=3.3W, Min Breakdown Voltage=26.7V, Min Operating Temperature=-65°C, Peak Pulse Current=10.3A, Peak Pulse Power=400W, Power Line Protection=No, Reverse Standoff Voltage=24V, Supplier Part Number 1=SMAJ24CALFCT-ND, Test Current=1mA, Category 1="TVS Diodes", Clamping Voltage-Max=38.9V, ComponentLink1Description=https://datasheet.ciiva.com/28473/607617-28473406.pdf?src-supplier=Element14, ComponentLink1URL=https://datasheet.ciiva.com/28473/607617-28473406.pdf?src-supplier=Element14, ComponentLink2Description=https://datasheet.ciiva.com/331/littelfuse-tvs-diode-smaj-datasheet-pdf-331049.pdf?src-supplier=Digikey, ComponentLink2URL=https://datasheet.ciiva.com/331/littelfuse-tvs-diode-smaj-datasheet-pdf-331049.pdf?src-supplier=Digikey, ComponentLink3Description=https://datasheet.ciiva.com/331/littelfuse-tvs-diode-smaj-datasheet-pdf-331050.pdf?src-supplier=Digikey, ComponentLink3URL=https://datasheet.ciiva.com/331/littelfuse-tvs-diode-smaj-datasheet-pdf-331050.pdf?src-supplier=Digikey, ComponentLink4Description=https://datasheet.ciiva.com/331/littelfuse-tvs-diode-smaj-datasheet-pdf-331048.pdf?src-supplier=Digikey, ComponentLink4URL=https://datasheet.ciiva.com/331/littelfuse-tvs-diode-smaj-datasheet-pdf-331048.pdf?src-supplier=Digikey, Description 1="SMAJ Series 38.9 V 0.4 kW Surface Mount Bi-Directional TVS Diode - DO-214AC", Diode Type=ZENER, Direction=Bidirectional, Height=2.29mm, Lead Free="Lead Free", Length=5.28mm, Manufacturer Part Number 1=SMAJ24CA, Max Reverse Leakage Current=1uA, Mount="Surface Mount", Number of Bidirectional Channels=1, Number of Elements=1, Number of Pins=2, Packaging="Tape and Reel", Polarity=Bidirectional, Power Dissipation=400W, Pricing 1="1=0,4, 10=0,287, 100=0,1449, 500=0,12844, 1000=0,09996, 2000=0,08947 (USD)", Reach SVHC Compliant=No, Reverse Breakdown Voltage=26.7V, Reverse Voltage=24V, RoHS 1=Yes, RoHS Compliant=Yes, Series=SMAJ, Stock 1=100645, Supplier 1=Digikey, Voltage Rating (DC)=24V, Width=2.79mm
F1: "2 A 250 V AC 125 V DC Fuse Board Mount (Cartridge Style)", Manufacturer=Littelfuse, Manufacturer Part Number=0505025.MXP, Category=Fuses, ComponentLink1Description=https://datasheet.ciiva.com/26890/getdatasheetpartid-706019-26890404.pdf?src-supplier=Verical, ComponentLink1URL=https://datasheet.ciiva.com/26890/getdatasheetpartid-706019-26890404.pdf?src-supplier=Verical, ComponentLink2Description=https://datasheet.ciiva.com/29618/littelfuse-fuse-505-datasheet-pdf-29618152.pdf?src-supplier=Digi-Key, ComponentLink2URL=https://datasheet.ciiva.com/29618/littelfuse-fuse-505-datasheet-pdf-29618152.pdf?src-supplier=Digi-Key, ComponentLink3Description=https://datasheet.ciiva.com/300/littelfuse-fuse-505-300507.pdf?src-supplier=Digi-Key, ComponentLink3URL=https://datasheet.ciiva.com/300/littelfuse-fuse-505-300507.pdf?src-supplier=Digi-Key, ComponentLink4Description=https://datasheet.ciiva.com/7314/697468-7314411.pdf?src-supplier=Newark, ComponentLink4URL=https://datasheet.ciiva.com/7314/697468-7314411.pdf?src-supplier=Newark, Pricing 1="1=5.43, 5=5.244, 10=5.057, 50=3.9336, 100=3.278, 250=3.18436, 500=2.71606, 1000=2.57558 (USD)", RoHS=Yes, Stock 1=3122
IC1: "UC3843 Switching IC 8.4V 500kHz", Supplier Part Number 1=296-27152-1-ND, Supplier 1=Digikey
L1 L2 L3 L4 L5 L6: library part "Bead 0805", "30 Ohms @ 100 MHz 1 Power Line Ferrite Bead 0805 (2012 Metric) 4A 14mOhm", Supplier 1="Arrow Electronics", Supplier Part Number 1=BLM21PG300SN1D
LCM1: "Common Mode Chokes / Filters 250V 0.02mH 1A DCR=0.12Ohms", Manufacturer 1=KEMET, Manufacturer Part Number 1=SCF25XV-350-2R4A003JV, Supplier Part Number 1=399-SCF25XV-350-2R4A003JV-ND, ComponentLink1Description="Datasheet URL", ComponentLink1URL=https://www.mouser.com/ds/2/599/6123-X240-240787.pdf, Description 1="Common Mode Choke, 220Uh, 35A, Radial; Dc Current Rating: 35A; Product Range: scf Series; Inductance: 220Μh", Pricing 1="1=11,56, 10=10,238, 35=9,908, 70=9,57786, 105=9,24752, 245=8,78518 (USD)", RoHS 1=No, Stock 1=63, Supplier 1=Digi-Key
LDM1: "Filters 25uH 2A DCR=42mOhms", Supplier Part Number 1=399-20548-ND, ComponentLink1Description=https://www.allegromicro.com/~/media/Files/Datasheets/ACS72981-Datasheet.ashx?src-supplier=Digi-Key, ComponentLink1URL=https://www.allegromicro.com/~/media/Files/Datasheets/ACS72981-Datasheet.ashx?src-supplier=Digi-Key, Supplier 1=Digikey
MOV1: "750 V 4.5 kA Varistor 1 Circuit Through Hole Disc 14mm", Capacitance=270pF, Case/Package=Radial, Clamping Current=50A, Clamping Voltage=1.24kV, Manufacturer 1=Bourns, Max Operating Temperature=85°C, Max Surge Current=4.5kA, Max Varistor Voltage=825V, Max Voltage Rating (AC)=460V, Max Voltage Rating (DC)=615V, Min Operating Temperature=-40°C, Min Varistor Voltage=675V, Package Quantity=500, Supplier Part Number 1=118-MOV-14D751K-ND, Tolerance=10%, Varistor Voltage=750V, Category 1=Varistors, ComponentLink1Description=https://media.digikey.com/pdf/Data%20Sheets/Bourns%20PDFs/GMOV_Series_DS.pdf?src-supplier=Digi-Key, ComponentLink1URL=https://media.digikey.com/pdf/Data%20Sheets/Bourns%20PDFs/GMOV_Series_DS.pdf?src-supplier=Digi-Key, ComponentLink2Description=https://datasheet.ciiva.com/3026/mov14d-3026373.pdf?src-supplier=Avnet, ComponentLink2URL=https://datasheet.ciiva.com/3026/mov14d-3026373.pdf?src-supplier=Avnet, ComponentLink3Description=https://datasheet.ciiva.com/369/mov14d-369435.pdf?src-supplier=Digikey, ComponentLink3URL=https://datasheet.ciiva.com/369/mov14d-369435.pdf?src-supplier=Digikey, Current Rating=50A, Description 1="Var MOV 460VAC/615VDC 4500A 750V Radial Bulk", Diameter=14mm, Energy=143J, Lead Pitch=7.5mm, Manufacturer Part Number 1=MOV-14D751K, Mount="Radial,Through Hole", Number of Circuits=1, Packaging=Bulk, Pricing 1="1=0,53, 10=0,458, 400=0,31723, 1200=0,20742, 5200=0,17691, 10000=0,16471 (USD)", Radiation Hardening=No, RoHS 1=Yes, RoHS Compliant=Yes, Series=-, Stock 1=4415, Supplier 1=Digikey, Voltage Rating (DC)=750V, Weight=0.105822oz
Q1: "Trans GP BJT PNP 40V 0.2A 300mW Automotive 3-Pin SOT-23 T/R", Manufacturer 1="ON Semiconductor", Manufacturer Part Number 1=SMMBT3906LT1G, Supplier Part Number 1=SMMBT3906LT1GOSCT-ND, Category 1=BJTs, ComponentLink1Description=https://datasheet.ciiva.com/980/mmbt3906lt1-d-980808.pdf?src-supplier=Digikey, ComponentLink1URL=https://datasheet.ciiva.com/980/mmbt3906lt1-d-980808.pdf?src-supplier=Digikey, ComponentLink2Description=https://datasheet.ciiva.com/16285/mmbt3906lt1-d-16285303.pdf?src-supplier=Mouser, ComponentLink2URL=https://datasheet.ciiva.com/16285/mmbt3906lt1-d-16285303.pdf?src-supplier=Mouser, ComponentLink3Description=https://datasheet.ciiva.com/11204/mmbt3906lt1-d-11204922.pdf?src-supplier=Avnet, ComponentLink3URL=https://datasheet.ciiva.com/11204/mmbt3906lt1-d-11204922.pdf?src-supplier=Avnet, Description 1="Trans GP BJT PNP 40V 0.2A 300mW Automotive 3-Pin SOT-23 T/R", Lead Free=5697LeadFree, Pricing 1="1=0,17, 10=0,124, 100=0,0667, 500=0,05236, 1000=0,03636, 3000=0,03012, 6000=0,02848, 9000=0,02424, 30000=0,02242, 75000=0,01939, 150000=0,01612 (USD)", RoHS 1=Yes, Stock 1=92580, Supplier 1=Digikey
Q2: "MOSFET N-CH 800V 8A TO247AC", Arrow Part Number=NVHL160N120SC1, Manufacturer_Name=onsemi, Mouser Part Number=863-NVHL160N120SC1, Supplier Part Number 1=742-SIHG11N80AE-GE3-ND, Arrow Price/Stock=https://www.arrow.com/en/products/nvhl160n120sc1/on-semiconductor, Datasheet Link=https://www.onsemi.com/pdf/datasheet/nvhl160n120sc1-d.pdf, Height=4.82mm, Manufacturer_Part_Number=NVHL160N120SC1, Mouser Price/Stock=https://www.mouser.co.uk/ProductDetail/ON-Semiconductor/NVHL160N120SC1?qs=GedFDFLaBXGyNe%2F0JxjRIw%3D%3D, Supplier 1=Digikey
R1 R2 R4: library part RES_2512_1M, "1M OHM 5% 3W 2512", Arrow Part Number=TLR3A30DR0015FTDG, Manufacturer_Name="TE Connectivity", Mouser Part Number=279-TLR3A30DR0015FTD, Supplier Part Number 1=A121173CT-ND, Arrow Price/Stock=https://www.arrow.com/en/products/tlr3a30dr0015ftdg/te-connectivity, Datasheet Link=http://www.te.com/commerce/DocumentDelivery/DDEController?Action=srchrtrv&DocNm=1879378&DocType=Customer+Drawing&DocLang=English, Height=0.8mm, Manufacturer_Part_Number=TLR3A30DR0015FTDG, Mouser Price/Stock=https://www.mouser.co.uk/ProductDetail/TE-Connectivity-CGS/TLR3A30DR0015FTDG?qs=Td4ahdVznEA1BjtU1QJrUg%3D%3D, Supplier 1=Digikey
R3 R5: library part RES_0805_33k, "33 kOhms ±1% 0.125W, 1/8W Chip Resistor 0805 (2012 Metric) Moisture Resistant Thick Film", Manufacturer 1=Yageo, Manufacturer Part Number 1=AC0805FR-0733RL, Supplier Part Number 1=1593995, Category 1="Chip SMD Resistors", ComponentLink1Description=http://www.mouser.com/ds/2/447/yageodocoutput-1111992.pdf?src-supplier=Mouser, ComponentLink1URL=http://www.mouser.com/ds/2/447/yageodocoutput-1111992.pdf?src-supplier=Mouser, ComponentLink2Description=http://www.yageo.com/NewPortal/yageodocoutput?fileName=/pdf/R-Chip/PYu-AC_51_RoHS_L_6.pdf&src-supplier=Digi-Key, ComponentLink2URL=http://www.yageo.com/NewPortal/yageodocoutput?fileName=/pdf/R-Chip/PYu-AC_51_RoHS_L_6.pdf&src-supplier=Digi-Key, ComponentLink3Description=https://www.yageo.com/upload/media/product/productsearch/datasheet/rchip/PYu-AC_51_RoHS_L_7.pdf?src-supplier=Digi-Key, ComponentLink3URL=https://www.yageo.com/upload/media/product/productsearch/datasheet/rchip/PYu-AC_51_RoHS_L_7.pdf?src-supplier=Digi-Key, ComponentLink4Description=http://www.yageo.com/NewPortal/yageodocoutput?fileName=/pdf/R-Chip/PYu-AC_51_RoHS_L_5.pdf&src-supplier=Digi-Key, ComponentLink4URL=http://www.yageo.com/NewPortal/yageodocoutput?fileName=/pdf/R-Chip/PYu-AC_51_RoHS_L_5.pdf&src-supplier=Digi-Key, ComponentLink5Description=https://datasheet.octopart.com/AC0805FR-0733RL-Yageo-datasheet-151884373.pdf?src-supplier=Future+Electronics, ComponentLink5URL=https://datasheet.octopart.com/AC0805FR-0733RL-Yageo-datasheet-151884373.pdf?src-supplier=Future+Electronics, Description 1="SMD Chip Resistor, 33 Ohm, ± 1%, 125 mW, 0805 [2012 Metric], Thick Film, General Purpose", Pricing 1="1=0,1, 10=0,029, 50=0,0188, 100=0,0158, 500=0,01096, 1000=0,00948 (USD)", RoHS 1=Yes, Stock 1=24620, Supplier 1="Future Electronics"
R6 R12 R13 R15 R16 R17 R18: library part RES_0805_10k, "10 kOhms ±1% 0.125W, 1/8W Chip Resistor 0805 (2012 Metric) Moisture Resistant Thick Film", Supplier Part Number 1=13-RC0805FR-1310KLDKR-ND, Supplier 1=Digi-Key
R7 R14: library part RES_0805_22R, "22 Ohms ±1% 0.125W, 1/8W Chip Resistor 0805 (2012 Metric) Automotive AEC-Q200, Moisture Resistant Thick Film", Manufacturer 1=Yageo, Manufacturer Part Number 1=AC0805FR-0733RL, Supplier Part Number 1=13-RC0805FR-0722RPCT-ND, Category 1="Chip SMD Resistors", ComponentLink1Description=http://www.mouser.com/ds/2/447/yageodocoutput-1111992.pdf?src-supplier=Mouser, ComponentLink1URL=http://www.mouser.com/ds/2/447/yageodocoutput-1111992.pdf?src-supplier=Mouser, ComponentLink2Description=http://www.yageo.com/NewPortal/yageodocoutput?fileName=/pdf/R-Chip/PYu-AC_51_RoHS_L_6.pdf&src-supplier=Digi-Key, ComponentLink2URL=http://www.yageo.com/NewPortal/yageodocoutput?fileName=/pdf/R-Chip/PYu-AC_51_RoHS_L_6.pdf&src-supplier=Digi-Key, ComponentLink3Description=https://www.yageo.com/upload/media/product/productsearch/datasheet/rchip/PYu-AC_51_RoHS_L_7.pdf?src-supplier=Digi-Key, ComponentLink3URL=https://www.yageo.com/upload/media/product/productsearch/datasheet/rchip/PYu-AC_51_RoHS_L_7.pdf?src-supplier=Digi-Key, ComponentLink4Description=http://www.yageo.com/NewPortal/yageodocoutput?fileName=/pdf/R-Chip/PYu-AC_51_RoHS_L_5.pdf&src-supplier=Digi-Key, ComponentLink4URL=http://www.yageo.com/NewPortal/yageodocoutput?fileName=/pdf/R-Chip/PYu-AC_51_RoHS_L_5.pdf&src-supplier=Digi-Key, ComponentLink5Description=https://datasheet.octopart.com/AC0805FR-0733RL-Yageo-datasheet-151884373.pdf?src-supplier=Future+Electronics, ComponentLink5URL=https://datasheet.octopart.com/AC0805FR-0733RL-Yageo-datasheet-151884373.pdf?src-supplier=Future+Electronics, Description 1="SMD Chip Resistor, 33 Ohm, ± 1%, 125 mW, 0805 [2012 Metric], Thick Film, General Purpose", Pricing 1="1=0,1, 10=0,029, 50=0,0188, 100=0,0158, 500=0,01096, 1000=0,00948 (USD)", RoHS 1=Yes, Stock 1=24620, Supplier 1=Digikey
R8 R9: library part RES_0805_12k, "12 kOhms ±1% 0.125W, 1/8W Chip Resistor 0805 (2012 Metric) Moisture Resistant Thick Film", Supplier Part Number 1=13-RC0805FR-1312KLCT-ND, Supplier 1=Digikey
R10 R11: library part RES_2512_180k, "RES 180K OHM 1% 2W 2512", Arrow Part Number=TLR3A30DR0015FTDG, Manufacturer_Name="TE Connectivity", Mouser Part Number=279-TLR3A30DR0015FTD, Supplier Part Number 1=A130748CT-ND, Arrow Price/Stock=https://www.arrow.com/en/products/tlr3a30dr0015ftdg/te-connectivity, Datasheet Link=http://www.te.com/commerce/DocumentDelivery/DDEController?Action=srchrtrv&DocNm=1879378&DocType=Customer+Drawing&DocLang=English, Height=0.8mm, Manufacturer_Part_Number=TLR3A30DR0015FTDG, Mouser Price/Stock=https://www.mouser.co.uk/ProductDetail/TE-Connectivity-CGS/TLR3A30DR0015FTDG?qs=Td4ahdVznEA1BjtU1QJrUg%3D%3D, Supplier 1=Digikey
R19: library part RES_0805_470, "470 Ohms ±1% 0.125W, 1/8W Chip Resistor 0805 (2012 Metric) Moisture Resistant Thick Film", Supplier Part Number 1=13-RC0805FR-07470RPCT-ND, Supplier 1=Digikey
R20: "2.2R 2512 1W 5%"
R21: "0 Ohms ±5% 1W, Moisture Resistant Thick Film", Manufacturer_Name=Bourns, Manufacturer_Part_Number=CR1206-F/-2R00ELF, Mouser Part Number=652-CR1206-F/2R00ELF, Supplier Part Number 1=541-4322-1-ND, Height=0.75mm, Mouser Price/Stock=https://www.mouser.co.uk/ProductDetail/Bourns/CR1206-F-2R00ELF?qs=W%2FMpXkg%252BdQ47Z%2FeZv1nDSg%3D%3D, Supplier 1=Digikey
RV1: "NTC Thermistor 20Ohms DIP 1A 25DegC  20R 9MM", Package=None, Check_prices=https://www.snapeda.com/parts/B72214S2271K101/EPCOS/view-part/?ref=eda, Digi-Key_Part_Number=495-1441-ND, MF=EPCOS, MP=B72214S2271K101, Purchase-URL=https://pricing.snapeda.com/search/part/B72214S2271K101/?ref=eda, SnapEDA_Link=https://www.snapeda.com/parts/B72214S2271K101/EPCOS/view-part/?ref=snap
U1 U2 U3: "Header Power 2 pins Type: KF301, 2 pins, 200mil (5.08mm) pitch"

## Via types
v1: diameter 23.62, hole 11.81, Top Layer to Bottom Layer, 12 vias
v2: diameter 35.43, hole 19.68, Top Layer to Bottom Layer, 1 vias

## Nets (pads, with @x,y where several pads share a name; then routed paths per layer and width w, separated by ;. In a path a pad name is that pad's centre, name@x,y a point inside that pad or via, vN(x,y) a via of type N, cw(c..) or ccw(c..) an arc to the next point about the centre after c; other vN are vias at no path point)
AC_L1: F1.1 U1.1
AC_L2: C1.1 LDM1.1 MOV1.1 RV1.2
AC_L3: BR1.~2 BR2.~2 C2.1 LCM1.3
AC_N1: C1.2 LCM1.2 MOV1.2 U1.2
AC_N2: BR1.~1 BR2.~1 C2.2 LCM1.4
COMP: C9.1 IC1.1 Q1.E R6.2 | length 897.8
  Top Layer w11.81: IC1.1 2842.33,2214.92 2904.96,2277.56 3046.91,2277.56 3055.77,2286.42 3055.77,2307.09 ; C9.1@3055.77,2465 3055.77,2364.17 3055.77,2307.09 ; Q1.E 3426.83,2462.6 3328.86,2462.6 3279.65,2413.39 3251.19,2413.39 3210.3,2372.5 3210.3,2349.94 3167.44,2307.09 3055.77,2307.09
GND: BR1.- BR2.- C5.2 C6.2 C7.2 C8.1 C10.2 C11.2 C12.2 C19.2 C20.2 C28.2 C30.1 IC1.5 Q1.C R2.1 R8.1 R16.1 R20.1 T1.1 | length 211
  Top Layer w15.75: v1(2762.46,2425.2) 2764.6,2425.2 2774.72,2435.32 2794.51,2435.32 2806.32,2447.13 R8.1 ; IC1.5 3089.03,2064.92 3094.98,2070.87 v1(3097.11,2070.87)
  Top Layer w27.56: 3864.83,2346.46 3864.83,2431.1 C7.2
  other v1: 3323.49,2279.25 3353.02,2279.25 3387.46,2279.25 3421.91,2279.25 3451.44,2279.25
GND_5V: C14.2 C15.2 C16.2 C29.2 L2.1 R12.1 R13.1 R21.2 T1.10
GND_24V: C23.2 C24.2 C25.2 C26.2 C27.2 C31.2 L4.1 L6.1 R17.1 R18.1 R21.1 T1.7
NetC3_2: C3.2 C4.2 C5.1 C6.1 R1.1 R2.2
NetC7_1: C7.1 D1.A Q1.B R3.2 | length 483.5
  Top Layer w11.81: Q1.B 3439.63,2395.67 3492.78,2395.67 R3.2@3502.62,2405.51 ; R3.2@3506.56,2409.45 R3.2 3515.39,2428.12 3515.39,2459.62 3540.02,2484.25 3687.66,2484.25 3725.06,2446.85 D1.A 3761.87,2405.51 3782.15,2425.79 C7.1
NetC13_2: C13.2 D3.K R10.1 R11.1
NetC17_1: C17.1 C18.1 D7.K L1.2 U2.2
NetC17_2: C17.2 C18.2 D7.A L2.2 U2.1
NetC21_1: C21.1 C22.1 D8.K L3.2 L5.2 U3.2
NetC21_2: C21.2 C22.2 D8.A L4.2 L6.2 U3.1
NetC30_2: C30.2 C31.1
NetD2_A: D2.A R7.2 | length 124.8
  Top Layer w11.81: D2.A 3152.23,2370.08 3152.23,2455.95 R7.2@3166.01,2469.73
NetD3_A: D3.A Q2.D T1.4 | length 1334.4
  Bottom Layer w98.43: T1.4@2423.3,1644.09 2571.91,1644.09 D3.A 2604.98,1775.59 2693.57,1864.17 Q2.D
NetD4_A: D4.A T1.12
NetD5_A: D5.A T1.3
NetD6_1: D6.1 T1.9
NetF1_2: F1.2 RV1.1
NetLCM1_1: LCM1.1 LDM1.2
NetQ2_G: Q2.G R14.2 R15.2 | length 354.3
  Top Layer w19.68: R15.2 3392.39,1937.91 R14.2 3467.69,1941.84 Q2.G
NetQ2_S: Q2.S R15.1 R19.2 R20.2
RT/CT: C12.1 IC1.4 R9.1 | length 205.7
  Top Layer w11.81: C12.1 C12.1 R9.1 2819.83,1970.79 IC1.4
VAUX: C19.1 C20.1 D5.K R5.2 R7.1 R16.2 | length 649